# Altium PCB ShutdownDPDT-P01-V00.PcbDoc
Units mm, origin at the board's own origin, x right, y up, seen from the top; angles counter-clockwise.
Board outline 227 x 54.1 mm, 2 copper layers (Top Layer, Bottom Layer); 90 components, 111 nets, 414 pads, 30 vias.
Unrouted connection lines stored in the file: 58.
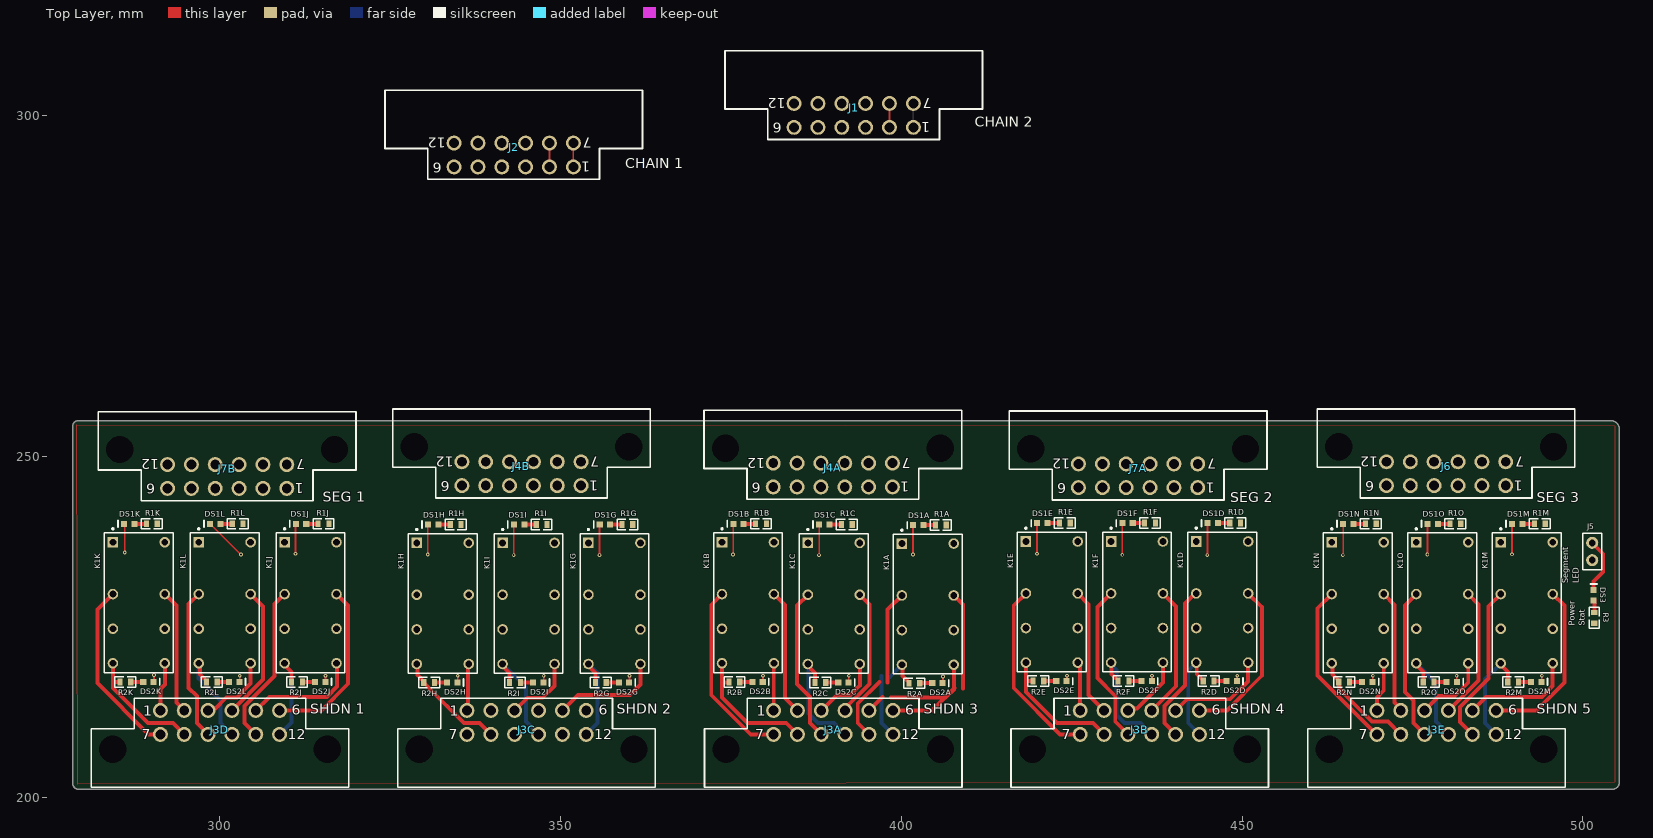
[diagram p0: Top Layer view]
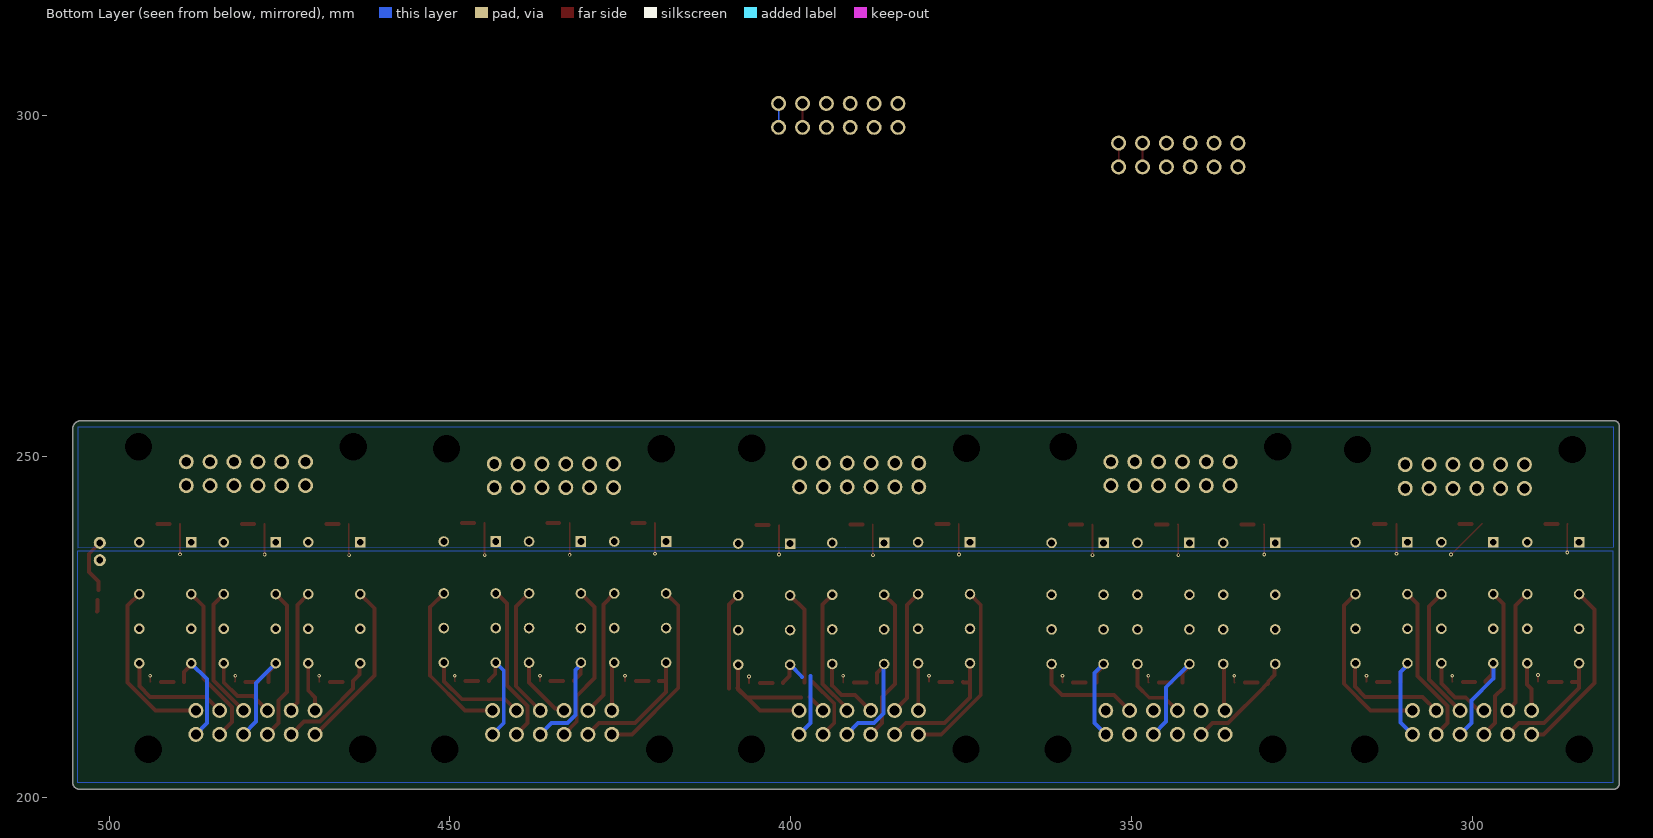
[diagram p1: Bottom Layer view, seen from below]
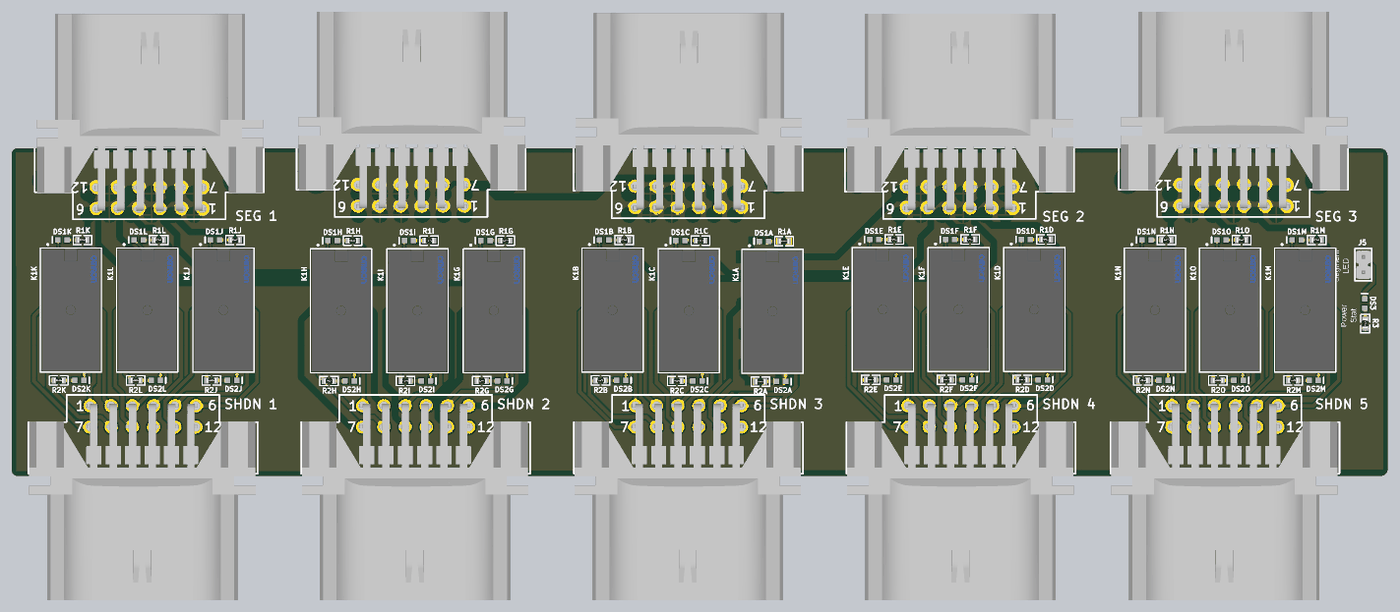
[diagram p2: 3D render of the assembled board from above, using the file's embedded part models]

## Layer stack, top to bottom
Top Solder: solder mask 0.0102, Solder Resist, Dk 3.5
Top Layer: signal copper 0.0356
Dielectric 1: dielectric 0.32, FR-4, Dk 4.8
Bottom Layer: signal copper 0.0356
Bottom Solder: solder mask 0.0102, Solder Resist, Dk 3.5

## Board outline
278.378,201.954 278.378,254.3 278.378,254.429 cw(c279.19,254.416) 279.203,255.229 504.128,255.229 cw(c504.128,253.979) 505.378,253.979 505.378,253.9 505.378,202.149 cw(c504.358,202.149) 504.358,201.129 279.303,201.129 cw(c279.253,202.004)

## Design rules (kind name [scope] priority, off if disabled: settings)
Clearance [All] p1: gap=0.254 ignorepadtopadclearanceinfootprint=FALSE except(0: Arc-Hole Track-Hole SMDPad-Hole THPad-Hole Via-Hole Fill-Hole Poly-Hole Region-Hole Text-Hole)
PlaneConnect PlaneConnect_1 [InNet('12V')] p1: planeconnectstyle=Direct reliefexpansion=0.508 reliefentries=4 reliefconductorwidth=0.254 reliefairgap=0.254
PlaneConnect [All] p2: planeconnectstyle=Direct reliefexpansion=0.508 reliefentries=4 reliefconductorwidth=0.254 reliefairgap=0.254
PolygonConnect "12V Rule" [InNet('12V')] p1: thpad.connectstyle=Relief thpad.reliefconductorwidth=0.254 thpad.reliefentries=4 thpad.polygonreliefangle="90 Angle" thpad.airgapwidth=0.254 smdpad.connectstyle=Relief smdpad.reliefconductorwidth=0.254 smdpad.reliefentries=4 smdpad.polygonreliefangle="90 Angle" smdpad.airgapwidth=0.254 via.connectstyle=Direct via.reliefconductorwidth=0.254 via.reliefentries=4 via.polygonreliefangle="90 Angle" via.airgapwidth=0.254
PolygonConnect [All] p2: thpad.connectstyle=Relief thpad.reliefconductorwidth=0.254 thpad.reliefentries=4 thpad.polygonreliefangle="90 Angle" thpad.airgapwidth=0.254 smdpad.connectstyle=Relief smdpad.reliefconductorwidth=0.254 smdpad.reliefentries=4 smdpad.polygonreliefangle="90 Angle" smdpad.airgapwidth=0.254 via.connectstyle=Direct via.reliefconductorwidth=0.254 via.reliefentries=4 via.polygonreliefangle="90 Angle" via.airgapwidth=0.254
RoomDefinition DPDT_Relay_15 [InComponentClass('DPDT_Relay_15')] p1: confinementstyle=ConfineIn formatcopy=TRUE lockcomponents=FALSE outline 351,214.5 363.3,214.5 363.3,242.3 351,242.3
RoomDefinition DPDT_Relay_16 [InComponentClass('DPDT_Relay_16')] p2: confinementstyle=ConfineIn formatcopy=TRUE lockcomponents=FALSE outline 325.8,214.5 338.1,214.5 338.1,242.3 325.8,242.3
RoomDefinition DPDT_Relay_11 [InComponentClass('DPDT_Relay_11')] p3: confinementstyle=ConfineIn formatcopy=TRUE lockcomponents=FALSE outline 397,214.4 409.3,214.4 409.3,242.2 397,242.2
RoomDefinition DPDT_Relay_19 [InComponentClass('DPDT_Relay_19')] p4: confinementstyle=ConfineIn formatcopy=TRUE lockcomponents=FALSE outline 484.9,214.6 497.2,214.6 497.2,242.4 484.9,242.4
RoomDefinition DPDT_Relay_12 [InComponentClass('DPDT_Relay_12')] p5: confinementstyle=ConfineIn formatcopy=TRUE lockcomponents=FALSE outline 370.6,214.6 382.9,214.6 382.9,242.4 370.6,242.4
RoomDefinition DPDT_Relay_14 [InComponentClass('DPDT_Relay_14')] p6: confinementstyle=ConfineIn formatcopy=TRUE lockcomponents=FALSE outline 415.2,214.7 427.5,214.7 427.5,242.5 415.2,242.5
RoomDefinition DPDT_Relay_22 [InComponentClass('DPDT_Relay_22')] p7: confinementstyle=ConfineIn formatcopy=TRUE lockcomponents=FALSE outline 427.7,214.7 440,214.7 440,242.5 427.7,242.5
RoomDefinition DPDT_Relay_13 [InComponentClass('DPDT_Relay_13')] p8: confinementstyle=ConfineIn formatcopy=TRUE lockcomponents=FALSE outline 440.2,214.7 452.5,214.7 452.5,242.5 440.2,242.5
RoomDefinition DPDT_Relay_21 [InComponentClass('DPDT_Relay_21')] p9: confinementstyle=ConfineIn formatcopy=TRUE lockcomponents=FALSE outline 383.2,214.5 395.5,214.5 395.5,242.3 383.2,242.3
RoomDefinition DPDT_Relay_18 [InComponentClass('DPDT_Relay_18')] p10: confinementstyle=ConfineIn formatcopy=TRUE lockcomponents=FALSE outline 281.2,214.6 293.5,214.6 293.5,242.4 281.2,242.4
RoomDefinition DPDT_Relay_17 [InComponentClass('DPDT_Relay_17')] p11: confinementstyle=ConfineIn formatcopy=TRUE lockcomponents=FALSE outline 306.4,214.6 318.7,214.6 318.7,242.4 306.4,242.4
RoomDefinition DPDT_Relay_23 [InComponentClass('DPDT_Relay_23')] p12: confinementstyle=ConfineIn formatcopy=TRUE lockcomponents=FALSE outline 338.4,214.5 350.7,214.5 350.7,242.3 338.4,242.3
RoomDefinition DPDT_Relay_24 [InComponentClass('DPDT_Relay_24')] p13: confinementstyle=ConfineIn formatcopy=TRUE lockcomponents=FALSE outline 293.8,214.6 306.1,214.6 306.1,242.4 293.8,242.4
RoomDefinition DPDT_Relay_25 [InComponentClass('DPDT_Relay_25')] p14: confinementstyle=ConfineIn formatcopy=TRUE lockcomponents=FALSE outline 472.5,214.6 484.8,214.6 484.8,242.4 472.5,242.4
RoomDefinition DPDT_Relay_110 [InComponentClass('DPDT_Relay_110')] p15: confinementstyle=ConfineIn formatcopy=TRUE lockcomponents=FALSE outline 460.1,214.6 472.4,214.6 472.4,242.4 460.1,242.4
RoomDefinition C [InComponentClass('C')] p16 off: confinementstyle=ConfineIn formatcopy=TRUE lockcomponents=FALSE outline 445.099,283.199 479.499,283.199 479.499,323.599 445.099,323.599
RoomDefinition A [InComponentClass('A')] p17 off: confinementstyle=ConfineIn formatcopy=TRUE lockcomponents=FALSE outline 178.943,64.262 268.2,64.262 268.2,284.5 178.943,284.5
RoomDefinition B2 [InComponentClass('B2')] p18 off: confinementstyle=ConfineIn formatcopy=TRUE lockcomponents=FALSE outline 0,0 50.8,0 50.8,25.4 0,25.4
RoomDefinition B1 [InComponentClass('B1')] p19 off: confinementstyle=ConfineIn formatcopy=TRUE lockcomponents=FALSE outline 0,0 50.8,0 50.8,25.4 0,25.4
RoomDefinition ShutdownDPDT-S01-V00 [InComponentClass('ShutdownDPDT-S01-V00')] p20 off: confinementstyle=ConfineIn formatcopy=TRUE lockcomponents=FALSE outline 178.943,24.892 248.666,24.892 248.666,65.278 178.943,65.278
RoomDefinition A1 [InComponentClass('A1')] p21 off: confinementstyle=ConfineIn formatcopy=TRUE lockcomponents=FALSE outline 178.943,471.424 213.36,471.424 213.36,512.191 178.943,512.191
RoomDefinition A2 [InComponentClass('A2')] p22 off: confinementstyle=ConfineIn formatcopy=TRUE lockcomponents=FALSE outline 178.943,103.759 213.36,103.759 213.36,144.526 178.943,144.526
RoomDefinition B [InComponentClass('B')] p23 off: confinementstyle=ConfineIn formatcopy=TRUE lockcomponents=FALSE outline 178.943,322.58 213.36,322.58 213.36,363.22 178.943,363.22
RoutingVias [All] p1: holewidth=0.711 width=1.27 viastyle="Through Hole" minholewidth=0.711 minwidth=1.27 maxholewidth=0.711 maxwidth=1.27
SolderMaskExpansion [All] p1: expansion=0.102 istentingtop=FALSE
Width [All] p1: maxlimit=0.58 minlimit=0.254 preferedwidth=0.254 minimp=50.000000 maximp=50.000000 favimp=50.000000
29 further rules are at their usual default settings.

## Classes and differential pairs
component class DPDT_Relay_110: DS1N DS2N K1N R1N R2N
component class DPDT_Relay_25: DS1O DS2O K1O R1O R2O
component class DPDT_Relay_19: DS1M DS2M K1M R1M R2M
component class C: J3E
component class DPDT_Relay_11: DS1A DS2A K1A R1A R2A
component class DPDT_Relay_18: DS1K DS2K K1K R1K R2K
component class DPDT_Relay_16: DS1H DS2H K1H R1H R2H
channel class ShutdownDPDT-S05-V00-SegmentGroup: A B
channel class ShutdownDPDT-S04-V00-RelayGroup: A1 A2 B1 B2
channel class ShutdownDPDT-S02-V00-Relay: DPDT_Relay_12 DPDT_Relay_13 DPDT_Relay_14 DPDT_Relay_15 DPDT_Relay_17 DPDT_Relay_21 DPDT_Relay_22 DPDT_Relay_23 DPDT_Relay_24 DPDT_Relay_31 DPDT_Relay_32
component class ShutdownDPDT-S01-V00: DS3 J1 J2 J5 J6 R3
component class B2: J3D
component class B1: J3B
component class A2: J3C
component class A1: J3A
component class DPDT_Relay_17: DS1J DS2J K1J R1J R2J
component class DPDT_Relay_15: DS1G DS2G K1G R1G R2G
component class DPDT_Relay_24: DS1L DS2L K1L R1L R2L
component class DPDT_Relay_23: DS1I DS2I K1I R1I R2I
component class DPDT_Relay_22: DS1F DS2F K1F R1F R2F
component class DPDT_Relay_21: DS1C DS2C K1C R1C R2C
component class DPDT_Relay_14: DS1E DS2E K1E R1E R2E
component class DPDT_Relay_13: DS1D DS2D K1D R1D R2D
component class DPDT_Relay_12: DS1B DS2B K1B R1B R2B
component class B: J4B J7B
component class A: J4A J7A

## Components (designator, comment, footprint, x,y, rotation, side; value= is the part's Value field where it differs from the comment)
DS1A "LED Red 0603" "LED RED 0603" 402.5,239.9 r180 top (schematic designator DS1)
DS1B "LED Red 0603" "LED RED 0603" 376.1,240.1 r180 top (schematic designator DS1)
DS1C "LED Red 0603" "LED RED 0603" 388.7,240 r180 top (schematic designator DS1)
DS1D "LED Red 0603" "LED RED 0603" 445.7,240.2 r180 top (schematic designator DS1)
DS1E "LED Red 0603" "LED RED 0603" 420.7,240.2 r180 top (schematic designator DS1)
DS1F "LED Red 0603" "LED RED 0603" 433.2,240.2 r180 top (schematic designator DS1)
DS1G "LED Red 0603" "LED RED 0603" 356.5,240 r180 top (schematic designator DS1)
DS1H "LED Red 0603" "LED RED 0603" 331.3,240 r180 top (schematic designator DS1)
DS1I "LED Red 0603" "LED RED 0603" 343.9,240 r180 top (schematic designator DS1)
DS1J "LED Red 0603" "LED RED 0603" 311.9,240.1 r180 top (schematic designator DS1)
DS1K "LED Red 0603" "LED RED 0603" 286.7,240.1 r180 top (schematic designator DS1)
DS1L "LED Red 0603" "LED RED 0603" 299.3,240.1 r180 top (schematic designator DS1)
DS1M "LED Red 0603" "LED RED 0603" 490.4,240.1 r180 top (schematic designator DS1)
DS1N "LED Red 0603" "LED RED 0603" 465.6,240.1 r180 top (schematic designator DS1)
DS1O "LED Red 0603" "LED RED 0603" 478,240.1 r180 top (schematic designator DS1)
DS2A "LED Red 0603" "LED RED 0603" 405.3,216.7 r0 top (schematic designator DS2)
DS2B "LED Red 0603" "LED RED 0603" 378.9,216.9 r0 top (schematic designator DS2)
DS2C "LED Red 0603" "LED RED 0603" 391.5,216.8 r0 top (schematic designator DS2)
DS2D "LED Red 0603" "LED RED 0603" 448.5,217 r0 top (schematic designator DS2)
DS2E "LED Red 0603" "LED RED 0603" 423.5,217 r0 top (schematic designator DS2)
DS2F "LED Red 0603" "LED RED 0603" 436,217 r0 top (schematic designator DS2)
DS2G "LED Red 0603" "LED RED 0603" 359.3,216.8 r0 top (schematic designator DS2)
DS2H "LED Red 0603" "LED RED 0603" 334.1,216.8 r0 top (schematic designator DS2)
DS2I "LED Red 0603" "LED RED 0603" 346.7,216.8 r0 top (schematic designator DS2)
DS2J "LED Red 0603" "LED RED 0603" 314.7,216.9 r0 top (schematic designator DS2)
DS2K "LED Red 0603" "LED RED 0603" 289.5,216.9 r0 top (schematic designator DS2)
DS2L "LED Red 0603" "LED RED 0603" 302.1,216.9 r0 top (schematic designator DS2)
DS2M "LED Red 0603" "LED RED 0603" 493.2,216.9 r0 top (schematic designator DS2)
DS2N "LED Red 0603" "LED RED 0603" 468.4,216.9 r0 top (schematic designator DS2)
DS2O "LED Red 0603" "LED RED 0603" 480.8,216.9 r0 top (schematic designator DS2)
DS3 "LED Green 0603" "LED GREEN 0603" 501.6,229.6 r90 top
J1 "MX120G" MX120G 393.009,298.288 r180 top
J2 "MX120G" MX120G 343.108,292.477 r180 top
J3A "MX120G" MX120G 390,212.7 r0 top (schematic designator J3)
J3B "MX120G" MX120G 435,212.7 r0 top (schematic designator J3)
J3C "MX120G" MX120G 345,212.7 r0 top (schematic designator J3)
J3D "MX120G" MX120G 300,212.7 r0 top (schematic designator J3)
J3E "MX120G" MX120G 478.55,212.7 r0 top (schematic designator J3)
J4A "MX120G" MX120G 389.95,245.5 r180 top (schematic designator J4)
J4B "MX120G" MX120G 344.25,245.7 r180 top (schematic designator J4)
J5 "Jumper 2Way Pins" Jumper_2Way_Pin 501.4,237.3 r90 top
J6 "MX120G" MX120G 479.95,245.7 r180 top
J7A "MX120G" MX120G 434.75,245.4 r180 top (schematic designator J7)
J7B "MX120G" MX120G 301.05,245.3 r180 top (schematic designator J7)
K1A "G5V-2-DC12" FP-G5V-2-DC12-MFG 403.89,228.31 r270 top (schematic designator K1)
K1B "G5V-2-DC12" FP-G5V-2-DC12-MFG 377.49,228.51 r270 top (schematic designator K1)
K1C "G5V-2-DC12" FP-G5V-2-DC12-MFG 390.09,228.41 r270 top (schematic designator K1)
K1D "G5V-2-DC12" FP-G5V-2-DC12-MFG 447.09,228.61 r270 top (schematic designator K1)
K1E "G5V-2-DC12" FP-G5V-2-DC12-MFG 422.09,228.61 r270 top (schematic designator K1)
K1F "G5V-2-DC12" FP-G5V-2-DC12-MFG 434.59,228.61 r270 top (schematic designator K1)
K1G "G5V-2-DC12" FP-G5V-2-DC12-MFG 357.89,228.41 r270 top (schematic designator K1)
K1H "G5V-2-DC12" FP-G5V-2-DC12-MFG 332.69,228.41 r270 top (schematic designator K1)
K1I "G5V-2-DC12" FP-G5V-2-DC12-MFG 345.29,228.41 r270 top (schematic designator K1)
K1J "G5V-2-DC12" FP-G5V-2-DC12-MFG 313.29,228.51 r270 top (schematic designator K1)
K1K "G5V-2-DC12" FP-G5V-2-DC12-MFG 288.09,228.51 r270 top (schematic designator K1)
K1L "G5V-2-DC12" FP-G5V-2-DC12-MFG 300.69,228.51 r270 top (schematic designator K1)
K1M "G5V-2-DC12" FP-G5V-2-DC12-MFG 491.79,228.51 r270 top (schematic designator K1)
K1N "G5V-2-DC12" FP-G5V-2-DC12-MFG 466.99,228.51 r270 top (schematic designator K1)
K1O "G5V-2-DC12" FP-G5V-2-DC12-MFG 479.39,228.51 r270 top (schematic designator K1)
R1A "1k 5% 0603" Res_ThinFilm_0603 405.8,239.9 r0 top (schematic designator R1)
R1B "1k 5% 0603" Res_ThinFilm_0603 379.4,240.1 r0 top (schematic designator R1)
R1C "1k 5% 0603" Res_ThinFilm_0603 392,240 r0 top (schematic designator R1)
R1D "1k 5% 0603" Res_ThinFilm_0603 449,240.2 r0 top (schematic designator R1)
R1E "1k 5% 0603" Res_ThinFilm_0603 424,240.2 r0 top (schematic designator R1)
R1F "1k 5% 0603" Res_ThinFilm_0603 436.5,240.2 r0 top (schematic designator R1)
R1G "1k 5% 0603" Res_ThinFilm_0603 359.8,240 r0 top (schematic designator R1)
R1H "1k 5% 0603" Res_ThinFilm_0603 334.6,240 r0 top (schematic designator R1)
R1I "1k 5% 0603" Res_ThinFilm_0603 347.2,240 r0 top (schematic designator R1)
R1J "1k 5% 0603" Res_ThinFilm_0603 315.2,240.1 r0 top (schematic designator R1)
R1K "1k 5% 0603" Res_ThinFilm_0603 290,240.1 r0 top (schematic designator R1)
R1L "1k 5% 0603" Res_ThinFilm_0603 302.6,240.1 r0 top (schematic designator R1)
R1M "1k 5% 0603" Res_ThinFilm_0603 493.7,240.1 r0 top (schematic designator R1)
R1N "1k 5% 0603" Res_ThinFilm_0603 468.9,240.1 r0 top (schematic designator R1)
R1O "1k 5% 0603" Res_ThinFilm_0603 481.3,240.1 r0 top (schematic designator R1)
R2A "1k 5% 0603" Res_ThinFilm_0603 401.9,216.7 r180 top (schematic designator R2)
R2B "1k 5% 0603" Res_ThinFilm_0603 375.5,216.9 r180 top (schematic designator R2)
R2C "1k 5% 0603" Res_ThinFilm_0603 388.1,216.8 r180 top (schematic designator R2)
R2D "1k 5% 0603" Res_ThinFilm_0603 445.1,217 r180 top (schematic designator R2)
R2E "1k 5% 0603" Res_ThinFilm_0603 420.1,217 r180 top (schematic designator R2)
R2F "1k 5% 0603" Res_ThinFilm_0603 432.6,217 r180 top (schematic designator R2)
R2G "1k 5% 0603" Res_ThinFilm_0603 355.9,216.8 r180 top (schematic designator R2)
R2H "1k 5% 0603" Res_ThinFilm_0603 330.7,216.8 r180 top (schematic designator R2)
R2I "1k 5% 0603" Res_ThinFilm_0603 343.3,216.8 r180 top (schematic designator R2)
R2J "1k 5% 0603" Res_ThinFilm_0603 311.3,216.9 r180 top (schematic designator R2)
R2K "1k 5% 0603" Res_ThinFilm_0603 286.1,216.9 r180 top (schematic designator R2)
R2L "1k 5% 0603" Res_ThinFilm_0603 298.8,216.9 r180 top (schematic designator R2)
R2M "1k 5% 0603" Res_ThinFilm_0603 489.8,216.9 r180 top (schematic designator R2)
R2N "1k 5% 0603" Res_ThinFilm_0603 465,216.9 r180 top (schematic designator R2)
R2O "1k 5% 0603" Res_ThinFilm_0603 477.4,216.9 r180 top (schematic designator R2)
R3 "10k 1% 0603" Res_ThinFilm_0603 501.7,226.3 r270 top

## Footprints (in the part's own frame and the unit in brackets; to place one, negate y for a bottom-side part, rotate by r counter-clockwise, add the part's x,y. Pads: shape width x height; smd on the part's side, far side on the other; paste and mask are expansions set on the pad)
FP-G5V-2-DC12-MFG [mm]
  rect 1.55x1.55 hole 1 paste-1000 mask+0: 1(-8.89,-3.81)
  round 1.55 hole 1 paste-1000 mask+0: 4(-1.27,-3.81) 6(3.81,-3.81) 8(8.89,-3.81) 9(8.89,3.81) 11(3.81,3.81) 13(-1.27,3.81) 16(-8.89,3.81)
  silkscreen extent -10.97,-5.05 10.25,5.05, body extent -10.35,-5.15 10.35,5.15, height 0.25
Jumper_2Way_Pin [mil]
  round 70 hole 40: 1(-100,0) 2(0,0)
  silkscreen extent -155,-55 55,55, body extent -142,-48 42,47, height 332
"LED GREEN 0603" [mil]
  rect 35x35 smd: 1(-30,0) 2(30,0)
  silkscreen extent 65,-20 65,20, body extent -40,-20 40,20, height 30
"LED RED 0603" [mil]
  rect 35x35 smd: 1(-30,0) 2(30,0)
  silkscreen extent 65,-20 65,20, body extent -40,-20 40,20, height 30
MX120G [mm]
  round 2.2 hole 1.45: 1(-8.75,0) 2(-5.25,0) 3(-1.75,0) 4(1.75,0) 5(5.25,0) 6(8.75,0) 7(-8.75,-3.5) 8(-5.25,-3.5) 9(-1.75,-3.5) 10(1.75,-3.5) 11(5.25,-3.5) 12(8.75,-3.5)
  round 0 hole 4 mask+0.254: NC(-15.75,-5.7) NC(15.75,-5.7)
  silkscreen extent -18.9,-11.25 18.9,1.8, body extent -18.78,-32.1 18.58,0.36, height 24.48
Res_ThinFilm_0603 [mil]
  rect 30x40 smd: 1(-31.24,0) 2(31.24,0)
  silkscreen extent -60,-30 60,30, body extent -31,-16 32,16, height 18

## Part data
J1 J2 J3A J3B J3C J3D J3E J4A J4B J6 J7A J7B: "MX120G with standard connector layout"
J5: library part "Jumper 2Way Vert Pins", "Jumper 2Way Vert Pins"
K1A K1B K1C K1D K1E K1F K1G K1H K1I K1J K1K K1L K1M K1N K1O: library part CMP-08823-000082-1, "RELAY GEN PURPOSE DPDT 2A 12VDC", Case/Package=DIP, Coil Current=41.7mA, Coil Power=500mW, Coil Resistance=288R, Coil Voltage (DC)=12V, Contact Current Rating=2A, Manufacturer Series=G5V-2, Max Operating Temperature=65°C, Max Voltage Rating (AC)=125V, Min Operating Temperature=-25°C, Package Quantity=25, Approvals=UL, Coil Type=Non-Latching, Contact Material=Gold, Current Rating=2A, Depth=10.1mm, Height=11.5mm, Lead Free="Lead Free", Length=20.5mm, Max Current Rating=2A, Max Voltage Rating (DC)=125V, Mount="Through Hole", Number of Pins=8, Operate Time=7ms, Packaging=Rail/Tube, Power Consumption=500mW, Power Rating=500mW, Radiation Hardening=No, Reference Standard=UL, Relay Action=MOMENTARY, Relay Function=DPDT, Relay Type="General Purpose", Release Time=3ms, Series=G5V-2, Termination="PC Pin", Throw Configuration=DPDT, Type=Electromechanical, Voltage Rating (AC)=125V, Voltage Rating (DC)=125V, Weight=5g, Width=10.1mm
R1A R1B R1C R1D R1E R1F R1G R1H R1I R1J R1K R1L R1M R1N R1O R2A R2B R2C R2D R2E R2F R2G R2H R2I R2J R2K R2L R2M R2N R2O: "Resistor, SMD, 1k, 0.1W, 5%, 0603"
R3: "Resistor, SMD, 10k, 0.1W, 1%, 0603"

## Via types
v1: diameter 0.55, hole 0.279, Top Layer to Bottom Layer, 30 vias

## Nets (pads, with @x,y where several pads share a name; then routed paths per layer and width w, separated by ;. In a path a pad name is that pad's centre, name@x,y a point inside that pad or via, vN(x,y) a via of type N, cw(c..) or ccw(c..) an arc to the next point about the centre after c; other vN are vias at no path point)
12V: J1.4 J1.5 J1.10 J1.11 J2.4 J2.5 J2.10 J2.11 J4A.7 J4A.9 J4A.11 J4B.7 J4B.9 J4B.11 J6.8 J6.10 J6.12 J7A.7 J7A.9 J7A.11 J7B.7 J7B.9 J7B.11 R3.2
CANH: J1.2 J1.8 J2.2 J2.8 | length 7
  Top Layer w0.254: J2.2 J2.8 ; J1.2 J1.8
CANL: J1.1 J1.7 J2.1 J2.7 | length 7
  Top Layer w0.254: J2.1 J2.7
  Bottom Layer w0.254: J1.1 J1.7
DET_IN_1A: J3A.2 K1B.13 | length 18.5
  Top Layer w0.58: K1B.13 382.9,228.18 382.9,214.55 J3A.2
DET_IN_1B: J3B.2 K1E.13 | length 18.8
  Top Layer w0.58: K1E.13 427.5,228.28 427.5,214.95 J3B.2
DET_IN_1C: J3C.2 K1H.13
DET_IN_1D: J3D.2 K1K.13 | length 18.3
  Top Layer w0.58: K1K.13 293.6,228.08 293.6,213.85 J3D.2
DET_IN_1E: J3E.2 K1N.13 | length 18.1
  Top Layer w0.58: K1N.13 472.4,228.18 472.4,213.85 473.3,212.95 J3E.2
DET_IN_2A: J3A.4 K1C.13 | length 19
  Top Layer w0.58: J3A.4 391.75,213.029 395.3,216.579 395.3,228.28 K1C.13
DET_IN_2B: J3B.4 K1F.13 | length 19.4
  Top Layer w0.58: J3B.4 436.75,212.704 440.3,216.254 440.3,227.98 K1F.13
DET_IN_2C: J3C.4 K1I.13
DET_IN_2D: J3D.4 K1L.13 | length 19.7
  Top Layer w0.58: J3D.4 301.75,212.704 306.3,217.254 306.3,227.98 K1L.13
DET_IN_2E: J3E.4 K1O.13 | length 19.5
  Top Layer w0.58: J3E.4 480.3,212.704 484.7,217.104 484.7,228.28 K1O.13
DET_IN_3A: J3A.6 K1A.13 | length 24.7
  Top Layer w0.58: J3A.6 404.5,212.7 407.819,216.019 ; K1A.13 409.019,228.261 409.019,215.919
DET_IN_3B: J3B.6 K1D.13 | length 24.2
  Top Layer w0.58: J3B.6 447.8,212.7 452.9,217.8 452.9,227.88 K1D.13
DET_IN_3C: J3C.6 K1G.13
DET_IN_3D: J3D.6 K1J.13 | length 25.5
  Top Layer w0.58: J3D.6 314.879,212.7 318.8,216.621 318.8,228.08 K1J.13
DET_IN_3E: J3E.6 K1M.13 | length 25.4
  Top Layer w0.58: J3E.6 493.2,212.7 497.3,216.8 497.3,228.08 K1M.13
DET_OUT_1A: J3A.1 K1B.9 | length 6.9
  Top Layer w0.58: J3A.1 381.275,212.725 381.275,219.595 K1B.9
DET_OUT_1B: J3B.1 K1E.9 | length 7.2
  Top Layer w0.58: K1E.9 425.9,219.458 426.25,219.108 J3B.1
DET_OUT_1C: J3C.1 K1H.9 | length 6.9
  Top Layer w0.58: J3C.1 336.375,212.825 336.375,219.395 K1H.9
DET_OUT_1D: J3D.1 K1K.9 | length 7.2
  Top Layer w0.58: J3D.1 291.25,215.83 291.9,216.48 K1K.9
DET_OUT_1E: J3E.1 K1N.9 | length 7.3
  Top Layer w0.58: J3E.1 469.8,214.6 470.8,215.6 K1N.9
DET_OUT_2A: J3A.3 K1C.9 | length 10.3
  Top Layer w0.58: J3A.3 390.55,215 392.541,215 393.9,216.359 K1C.9
DET_OUT_2B: J3B.3 K1F.9 | length 9.8
  Top Layer w0.58: J3B.3 433.56,213.01 434.61,213.01 438.4,216.8 K1F.9
DET_OUT_2C: J3C.3 K1I.9 | length 10.6
  Top Layer w0.58: J3C.3 345.12,214.57 347.37,214.57 349.1,216.3 K1I.9
DET_OUT_2D: J3D.3 K1L.9 | length 10.9
  Top Layer w0.58: J3D.3 298.56,213.01 299.31,213.01 300.92,214.62 302.486,214.62 304.5,216.634 K1L.9
DET_OUT_2E: J3E.3 K1O.9 | length 10.9
  Top Layer w0.58: J3E.3 478.9,214.8 481.216,214.8 483.2,216.784 K1O.9
DET_OUT_3A: J3A.5 K1A.9 | length 16.2
  Top Layer w0.58: J3A.5 397.25,214.7 ; 398.45,214.6 406.5,214.6 407.7,215.8 K1A.9
DET_OUT_3B: J3B.5 K1D.9 | length 15.2
  Top Layer w0.58: J3B.5 441.894,214.344 448.264,214.344 450.9,216.98 K1D.9
DET_OUT_3C: J3C.5 K1G.9 | length 16
  Top Layer w0.58: J3C.5 352.55,215 360.2,215 361.7,216.5 K1G.9
DET_OUT_3D: J3D.5 K1J.9 | length 16.9
  Top Layer w0.58: J3D.5 307.25,214.7 315.7,214.7 317.2,216.2 317.2,219.52 K1J.9
DET_OUT_3E: J3E.5 K1M.9 | length 16.6
  Top Layer w0.58: J3E.5 485.8,214.7 494.021,214.7 495.6,216.279 K1M.9
GND: DS3.2 J1.3 J1.6 J1.9 J1.12 J2.3 J2.6 J2.9 J2.12 J5.2 K1A.1 K1B.1 K1C.1 K1D.1 K1E.1 K1F.1 K1G.1 K1H.1 K1I.1 K1J.1 K1K.1 K1L.1 K1M.1 K1N.1 K1O.1 | length 8.2
  Top Layer w0.58: J5.2 503,235.7 503,233 501.6,231.6 DS3.2
"LED GND": DS1A.2 DS1B.2 DS1C.2 DS1D.2 DS1E.2 DS1F.2 DS1G.2 DS1H.2 DS1I.2 DS1J.2 DS1K.2 DS1L.2 DS1M.2 DS1N.2 DS1O.2 DS2A.2 DS2B.2 DS2C.2 DS2D.2 DS2E.2 DS2F.2 DS2G.2 DS2H.2 DS2I.2 DS2J.2 DS2K.2 DS2L.2 DS2M.2 DS2N.2 DS2O.2 J5.1 | length 83.5
  Top Layer w0.254: DS1K.2 286.02,240.018 v1(286.02,235.9) ; DS2K.2 290.3,216.938 v1(290.3,217.9) ; DS1L.2 303.038,235.6 v1(303.1,235.6) ; DS2L.2 302.9,216.938 v1(302.9,217.8) ; v1(311.1,235.7) 311.1,240.062 DS1J.2 ; DS2J.2 315.5,216.938 v1(315.5,217.8) ; v1(330.5,235.6) 330.5,239.962 DS1H.2 ; DS2H.2 334.9,216.838 v1(334.9,217.8) ; v1(343.1,235.5) 343.1,239.962 DS1I.2 ; DS2I.2 347.5,216.838 v1(347.5,217.8) ; v1(355.7,235.5) 355.7,239.962 DS1G.2 ; DS2G.2 360.1,216.838 v1(360.1,217.8) ; v1(375.3,235.6) 375.338,235.638 DS1B.2 ; DS2B.2 379.7,216.938 v1(379.7,217.8) ; v1(387.9,235.5) 387.938,235.538 DS1C.2 ; DS2C.2 392.3,216.838 v1(392.3,217.8) ; v1(401.7,235.6) 401.7,239.862 DS1A.2 ; DS2A.2 406.1,216.738 v1(406.1,217.7) ; v1(419.9,235.7) 419.9,240.162 DS1E.2 ; DS2E.2 424.3,217.038 v1(424.3,217.8) ; v1@432.4,235.5 v1(432.438,235.538) DS1F.2 ; DS2F.2 436.8,217.038 v1(436.8,217.8) ; v1(444.9,235.5) 444.938,235.538 DS1D.2 ; DS2D.2 449.3,217.038 v1(449.3,217.8) ; v1(464.8,235.5) 464.838,235.538 DS1N.2 ; DS2N.2 469.2,216.938 v1(469.2,217.8) ; v1(477.2,235.6) 477.238,235.638 DS1O.2 ; v1(481.5,217.8) 481.5,216.962 DS2O.2 ; v1@489.6,235.6 489.638,235.638 DS1M.2 ; DS2M.2 494,216.938 v1(494,217.8)
  other v1: 489.619,235.619
NetDS1A_1: DS1A.1 R1A.1 | length 1.7
  Top Layer w0.58: DS1A.1 R1A.1
NetDS1B_1: DS1B.1 R1B.1 | length 1.7
  Top Layer w0.58: DS1B.1 R1B.1
NetDS1C_1: DS1C.1 R1C.1 | length 1.7
  Top Layer w0.58: DS1C.1 R1C.1
NetDS1D_1: DS1D.1 R1D.1 | length 1.7
  Top Layer w0.58: DS1D.1 R1D.1
NetDS1E_1: DS1E.1 R1E.1 | length 1.7
  Top Layer w0.58: DS1E.1 R1E.1
NetDS1F_1: DS1F.1 R1F.1 | length 1.7
  Top Layer w0.58: DS1F.1 R1F.1
NetDS1G_1: DS1G.1 R1G.1 | length 1.7
  Top Layer w0.58: DS1G.1 R1G.1
NetDS1H_1: DS1H.1 R1H.1 | length 1.7
  Top Layer w0.58: DS1H.1 R1H.1
NetDS1I_1: DS1I.1 R1I.1 | length 1.7
  Top Layer w0.58: DS1I.1 R1I.1
NetDS1J_1: DS1J.1 R1J.1 | length 1.7
  Top Layer w0.58: DS1J.1 R1J.1
NetDS1K_1: DS1K.1 R1K.1 | length 1.7
  Top Layer w0.58: DS1K.1 R1K.1
NetDS1L_1: DS1L.1 R1L.1 | length 1.7
  Top Layer w0.58: DS1L.1 R1L.1
NetDS1M_1: DS1M.1 R1M.1 | length 1.7
  Top Layer w0.58: DS1M.1 R1M.1
NetDS1N_1: DS1N.1 R1N.1 | length 1.7
  Top Layer w0.58: DS1N.1 R1N.1
NetDS1O_1: DS1O.1 R1O.1 | length 1.7
  Top Layer w0.58: DS1O.1 R1O.1
NetDS2A_1: DS2A.1 R2A.1 | length 1.8
  Top Layer w0.58: R2A.1 DS2A.1
NetDS2B_1: DS2B.1 R2B.1 | length 1.8
  Top Layer w0.58: R2B.1 DS2B.1
NetDS2C_1: DS2C.1 R2C.1 | length 1.8
  Top Layer w0.58: R2C.1 DS2C.1
NetDS2D_1: DS2D.1 R2D.1 | length 1.8
  Top Layer w0.58: R2D.1 DS2D.1
NetDS2E_1: DS2E.1 R2E.1 | length 1.8
  Top Layer w0.58: R2E.1 DS2E.1
NetDS2F_1: DS2F.1 R2F.1 | length 1.8
  Top Layer w0.58: R2F.1 DS2F.1
NetDS2G_1: DS2G.1 R2G.1 | length 1.8
  Top Layer w0.58: R2G.1 DS2G.1
NetDS2H_1: DS2H.1 R2H.1 | length 1.8
  Top Layer w0.58: R2H.1 DS2H.1
NetDS2I_1: DS2I.1 R2I.1 | length 1.8
  Top Layer w0.58: R2I.1 DS2I.1
NetDS2J_1: DS2J.1 R2J.1 | length 1.8
  Top Layer w0.58: R2J.1 DS2J.1
NetDS2K_1: DS2K.1 R2K.1 | length 1.8
  Top Layer w0.58: R2K.1 DS2K.1
NetDS2L_1: DS2L.1 R2L.1 | length 1.7
  Top Layer w0.58: R2L.1 DS2L.1
NetDS2M_1: DS2M.1 R2M.1 | length 1.8
  Top Layer w0.58: R2M.1 DS2M.1
NetDS2N_1: DS2N.1 R2N.1 | length 1.8
  Top Layer w0.58: R2N.1 DS2N.1
NetDS2O_1: DS2O.1 R2O.1 | length 1.8
  Top Layer w0.58: R2O.1 DS2O.1
NetDS3_1: DS3.1 R3.1 | length 1.8
  Top Layer w0.58: DS3.1@501.7,228.938 501.7,227.284 501.791,227.193 R3.1@501.8,227.193
SEG1_IN: J6.11 K1N.16 R1N.2
SEG1_INA: J4A.8 K1B.16 R1B.2
SEG1_INB: J4B.8 K1H.16 R1H.2
SEG2_IN: J6.9 K1O.16 R1O.2
SEG2_INA: J4A.10 K1C.16 R1C.2
SEG2_INB: J4B.10 K1I.16 R1I.2
SEG3_IN: J6.7 K1M.16 R1M.2
SEG3_INA: J4A.12 K1A.16 R1A.2
SEG3_INB: J4B.12 K1G.16 R1G.2
SEG4_INA: J7A.12 K1E.16 R1E.2
SEG4_INB: J7B.12 K1K.16 R1K.2
SEG5_INA: J7A.10 K1F.16 R1F.2
SEG5_INB: J7B.10 K1L.16 R1L.2
SEG6_INA: J7A.8 K1D.16 R1D.2
SEG6_INB: J7B.8 K1J.16 R1J.2
SHDN_IN_1A: J3A.8 K1B.8 R2B.2 | length 19.4
  Top Layer w0.58: K1B.8 373.68,216.8 ; R2B.2 374.707,216.891 374.616,216.8 373.68,216.8 ; J3A.8 383.106,210.844 377.435,210.844 373.68,214.599 373.68,216.8
SHDN_IN_1B: J3B.8 K1E.8 R2E.2 | length 19.4
  Top Layer w0.58: K1E.8 418.28,217 ; R2E.2 418.28,217 ; J3B.8 428.106,210.844 422.835,210.844 418.28,215.399 418.28,217
SHDN_IN_1C: J3C.8 K1H.8 R2H.2 | length 16.3
  Top Layer w0.58: K1H.8 328.959,219.441 328.959,217.875 329.907,216.927 329.907,216.673 329.998,216.582 330.125,216.582 330.568,216.138 330.568,216.057 335.781,210.844 338.106,210.844 J3C.8
SHDN_IN_1D: J3D.8 K1K.8 R2K.2 | length 17.9
  Top Layer w0.58: K1K.8 284.3,219.6 284.3,216.9 ; R2K.2 284.3,216.9 ; J3D.8 293.106,210.844 289.456,210.844 284.3,216 284.3,216.9
SHDN_IN_1E: J3E.8 K1N.8 R2N.2 | length 16
  Top Layer w0.58: K1N.8 463.259,219.541 463.259,217.975 464.207,217.027 464.207,215.893 467.5,212.6 469.045,211.055 471.445,211.055 J3E.8
SHDN_IN_2A: J3A.10 K1C.8 R2C.2 | length 17.1
  Top Layer w0.58: K1C.8 386.28,219.258 387.307,218.231 R2C.2
  Bottom Layer w0.58: K1C.8 386.394,219.406 386.394,212.231 387.781,210.844 390.106,210.844 J3A.10
SHDN_IN_2B: J3B.10 K1F.8 R2F.2 | length 17.5
  Top Layer w0.58: K1F.8 430.859,219.641 430.859,218.075 431.807,217.127 R2F.2
  Bottom Layer w0.58: K1F.8 430.78,219.458 431.606,218.632 431.606,212.019 432.781,210.844 435.106,210.844 J3B.10
SHDN_IN_2C: J3C.10 K1I.8 R2I.2 | length 15.6
  Top Layer w0.58: K1I.8 341.48,219.258 342.507,218.231 R2I.2
  Bottom Layer w0.58: K1I.8 344.894,216.106 344.894,211.056 J3C.10
SHDN_IN_2D: J3D.10 K1L.8 R2L.2 | length 15.6
  Top Layer w0.58: K1L.8 297.059,219.441 297.059,217.975 298.007,217.027 R2L.2
  Bottom Layer w0.58: K1L.8 296.88,217.42 300.106,214.194 300.106,210.844 J3D.10
SHDN_IN_2E: J3E.10 K1O.8 R2O.2 | length 15.5
  Top Layer w0.58: K1O.8 475.58,219.358 476.607,218.331 R2O.2
  Bottom Layer w0.58: K1O.8 478.444,216.756 478.444,211.056 J3E.10
SHDN_IN_3A: J3A.12 K1A.8 R2A.2 | length 14.9
  Top Layer w0.58: K1A.8 400.159,219.341 400.159,217.775 401.107,216.827 R2A.2
  Bottom Layer w0.58: 397.106,217.746 397.106,210.844 J3A.12 ; 398.306,217.646 K1A.8
SHDN_IN_3B: J3B.12 K1D.8 R2D.2 | length 14.8
  Top Layer w0.58: K1D.8 443.359,219.641 443.359,218.075 444.307,217.127 R2D.2
  Bottom Layer w0.58: K1D.8 442.106,218.546 442.106,210.844 J3B.12
SHDN_IN_3C: J3C.12 K1G.8 R2G.2 | length 14.7
  Top Layer w0.58: K1G.8 354.08,219.258 355.107,218.231 R2G.2
  Bottom Layer w0.58: J3C.12 355.394,210.844 355.394,218.206 K1G.8
SHDN_IN_3D: J3D.12 K1J.8 R2J.2 | length 14.7
  Top Layer w0.58: K1J.8 309.48,219.358 310.507,218.331 R2J.2
  Bottom Layer w0.58: J3D.12 310.5,210.95 310.5,218.338 309.48,219.358 K1J.8
SHDN_IN_3E: J3E.12 K1M.8 R2M.2 | length 15.2
  Top Layer w0.58: K1M.8 487.98,219.358 489.007,218.331 R2M.2
  Bottom Layer w0.58: J3E.12 485.656,210.844 485.656,217.296 K1M.8
SHDN_OUT_1A: J3A.7 K1B.4 | length 27
  Top Layer w0.58: K1B.4 372.1,228.2 372.1,215 377.9,209.2 J3A.7
SHDN_OUT_1B: J3B.7 K1E.4 | length 27.2
  Top Layer w0.58: K1E.4 416.5,228.1 416.5,216 423.3,209.2 J3B.7
SHDN_OUT_1C: J3C.7 K1H.4
SHDN_OUT_1D: J3D.7 K1K.4 | length 26.4
  Top Layer w0.58: K1K.4 282,227.5 282,216.7 289.5,209.2 J3D.7
SHDN_OUT_1E: J3E.7 K1N.4 | length 25.1
  Top Layer w0.58: K1N.4 461.1,227.7 461.1,217.821 469.721,209.2 J3E.7
SHDN_OUT_2A: J3A.9 K1C.4 | length 22.6
  Top Layer w0.58: K1C.4 384.7,228.1 384.7,216.6 386.606,214.694 386.606,210.844 J3A.9
SHDN_OUT_2B: J3B.9 K1F.4 | length 23.3
  Top Layer w0.58: K1F.4 428.8,227.9 428.8,217.444 431.394,214.85 431.394,211.056 J3B.9
SHDN_OUT_2C: J3C.9 K1I.4
SHDN_OUT_2D: J3D.9 K1L.4 | length 22.4
  Top Layer w0.58: K1L.4 295.4,228.3 295.4,216 296.606,214.794 296.606,210.844 J3D.9
SHDN_OUT_2E: J3E.9 K1O.4 | length 22.5
  Top Layer w0.58: K1O.4 473.9,228.1 473.9,215.4 475.156,214.144 475.156,210.844 J3E.9
SHDN_OUT_3A: J3A.11 K1A.4 | length 23.4
  Top Layer w0.58: J3A.11 393.6,210.85 393.6,213.7 396.8,216.9 ; 398,216.8 398,227.5 K1A.4
SHDN_OUT_3B: J3B.11 K1D.4 | length 23.4
  Top Layer w0.58: J3B.11 438.606,210.844 438.606,213.381 441.6,216.375 441.6,228.4 443.08,229.88 K1D.4
SHDN_OUT_3C: J3C.11 K1G.4
SHDN_OUT_3D: J3D.11 K1J.4 | length 23.7
  Top Layer w0.58: J3D.11 303.6,210.85 303.6,213.375 308,217.775 308,228.3 K1J.4
SHDN_OUT_3E: J3E.11 K1M.4 | length 23.8
  Top Layer w0.58: J3E.11 482,211 482,213.225 485.075,216.3 486.2,217.425 486.2,228 K1M.4
pads on no net: J1.NC J2.NC J3A.NC J3B.NC J3C.NC J3D.NC J3E.NC J4A.1 J4A.2 J4A.3 J4A.4 J4A.5 J4A.6 J4A.NC J4B.1 J4B.2 J4B.3 J4B.4 J4B.5 J4B.6 J4B.NC J6.1 J6.2 J6.3 J6.4 J6.5 J6.6 J6.NC J7A.1 J7A.2 J7A.3 J7A.4 J7A.5 J7A.6 J7A.NC J7B.1 J7B.2 J7B.3 J7B.4 J7B.5 J7B.6 J7B.NC K1A.6 K1A.11 K1B.6 K1B.11 K1C.6 K1C.11 K1D.6 K1D.11 K1E.6 K1E.11 K1F.6 K1F.11 K1G.6 K1G.11 K1H.6 K1H.11 K1I.6 K1I.11 K1J.6 K1J.11 K1K.6 K1K.11 K1L.6 K1L.11 K1M.6 K1M.11 K1N.6 K1N.11 K1O.6 K1O.11

## Polygon pours and split planes (outlines as drawn)
GND on Bottom Layer "GNDP" (solid, shelved, pour order 2): 279.2,236.753 279.2,254.3 504.6,254.3 504.6,236.553
"LED GND" on Bottom Layer "LED GND" (solid, shelved, pour order 1): 279.269,202.149 279.269,236.1 504.7,236.1 504.7,202.149
12V on Top Layer "GNDP" (solid, shelved, pour order 0): 279,254.6 504.7,254.5 504.7,202.149 279.1,201.9

## Other copper
Top Layer:

## Silkscreen, mask and mechanical layers (free items; w line width, h text height)
Top Overlay:
  text "CHAIN 2" at 410.754,298.354 h1.52
  text "CHAIN 1" at 359.454,292.254 h1.52
  text "SEG 1" at 315.054,243.354 h1.52
  text "SEG 2" at 448.254,243.254 h1.52
  text "SEG 3" at 493.254,243.254 h1.52
  text "Segment / LED" at 499.7,231.369 h1.5 r90
  text "Power / Stat" at 500.6,225.1 h1.5 r90
  text "SHDN 1" at 313.254,212.254 h1.52
  text "SHDN 2" at 358.254,212.254 h1.52
  text "SHDN 3" at 403.254,212.254 h1.52
  text "SHDN 4" at 448.254,212.254 h1.52
  text "SHDN 5" at 493.254,212.254 h1.52
Mechanical 1:
  lines w1: 278.378,254.3 278.378,201.954 ccw(c279.253,202.004) 279.303,201.129 504.358,201.129 ccw(c504.358,202.149) 505.378,202.149 505.378,253.9 ; 278.378,254.429 cw(c279.19,254.416) 279.203,255.229 504.128,255.229 cw(c504.128,253.979) 505.378,253.979

## Text inside footprints (layer, text, board x,y; h text height)
J1: Top Overlay "1" at 404.255,299.034 h1.52 r180; Top Overlay "7" at 404.455,302.534 h1.52 r180; Top Overlay "6" at 382.455,298.934 h1.52 r180; Top Overlay "12" at 383.055,302.534 h1.52 r180
J2: Top Overlay "1" at 354.354,293.223 h1.52 r180; Top Overlay "7" at 354.554,296.723 h1.52 r180; Top Overlay "6" at 332.554,293.123 h1.52 r180; Top Overlay "12" at 333.154,296.723 h1.52 r180
J3A: Top Overlay "1" at 378.754,211.954 h1.52; Top Overlay "7" at 378.554,208.454 h1.52; Top Overlay "6" at 400.554,212.054 h1.52; Top Overlay "12" at 399.954,208.454 h1.52
J3B: Top Overlay "1" at 423.754,211.954 h1.52; Top Overlay "7" at 423.554,208.454 h1.52; Top Overlay "6" at 445.554,212.054 h1.52; Top Overlay "12" at 444.954,208.454 h1.52
J3C: Top Overlay "1" at 333.754,211.954 h1.52; Top Overlay "7" at 333.554,208.454 h1.52; Top Overlay "6" at 355.554,212.054 h1.52; Top Overlay "12" at 354.954,208.454 h1.52
J3D: Top Overlay "1" at 288.754,211.954 h1.52; Top Overlay "7" at 288.554,208.454 h1.52; Top Overlay "6" at 310.554,212.054 h1.52; Top Overlay "12" at 309.954,208.454 h1.52
J3E: Top Overlay "1" at 467.304,211.954 h1.52; Top Overlay "7" at 467.104,208.454 h1.52; Top Overlay "6" at 489.104,212.054 h1.52; Top Overlay "12" at 488.504,208.454 h1.52
J4A: Top Overlay "1" at 401.196,246.246 h1.52 r180; Top Overlay "7" at 401.396,249.746 h1.52 r180; Top Overlay "6" at 379.396,246.146 h1.52 r180; Top Overlay "12" at 379.996,249.746 h1.52 r180
J4B: Top Overlay "1" at 355.496,246.446 h1.52 r180; Top Overlay "7" at 355.696,249.946 h1.52 r180; Top Overlay "6" at 333.696,246.346 h1.52 r180; Top Overlay "12" at 334.296,249.946 h1.52 r180
J6: Top Overlay "1" at 491.196,246.446 h1.52 r180; Top Overlay "7" at 491.396,249.946 h1.52 r180; Top Overlay "6" at 469.396,246.346 h1.52 r180; Top Overlay "12" at 469.996,249.946 h1.52 r180
J7A: Top Overlay "1" at 445.996,246.146 h1.52 r180; Top Overlay "7" at 446.196,249.646 h1.52 r180; Top Overlay "6" at 424.196,246.046 h1.52 r180; Top Overlay "12" at 424.796,249.646 h1.52 r180
J7B: Top Overlay "1" at 312.296,246.046 h1.52 r180; Top Overlay "7" at 312.496,249.546 h1.52 r180; Top Overlay "6" at 290.496,245.946 h1.52 r180; Top Overlay "12" at 291.096,249.546 h1.52 r180